# EAGLE board Clock_generator (EAGLE 9.6.2)
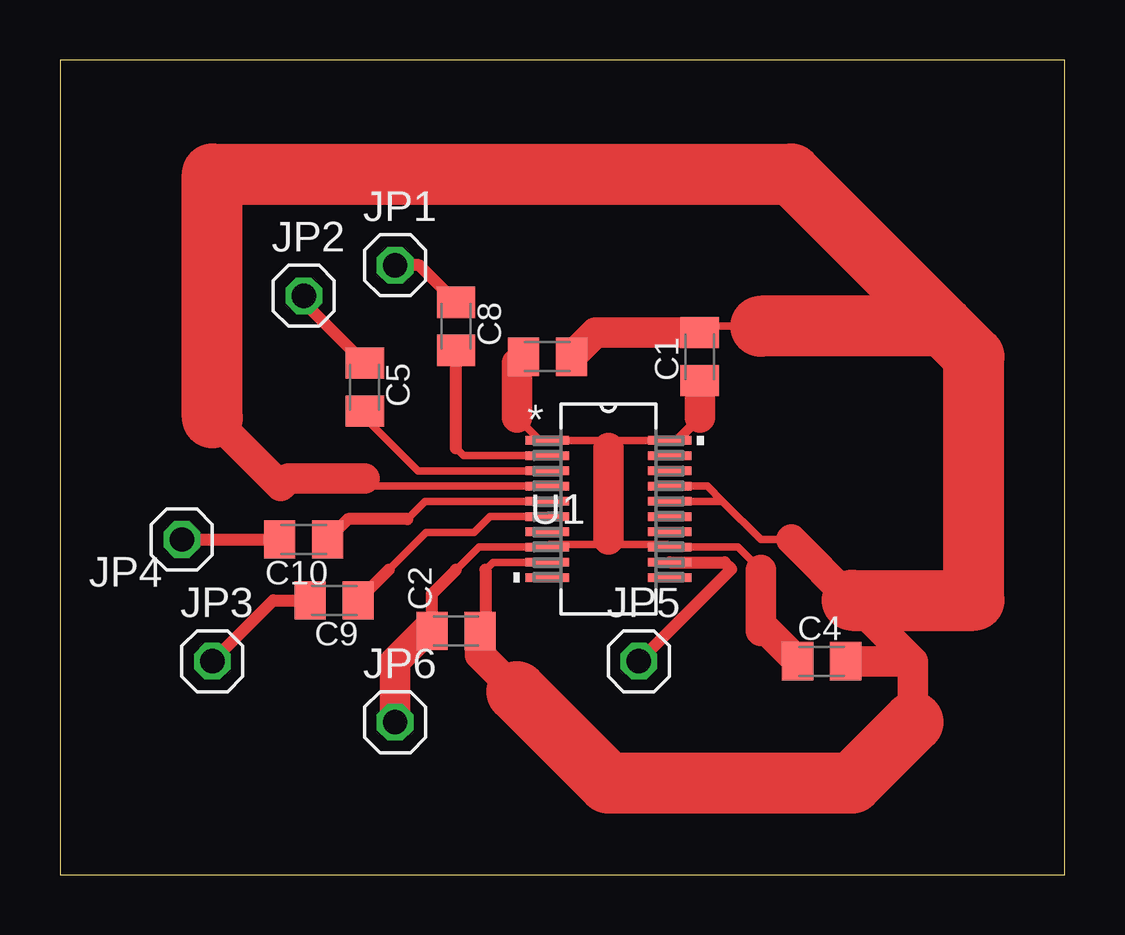
[diagram p0: board, top side]

Size 41.89 x 33.96 mm. Coordinates in mm from the lower left corner, seen from the top.
Outline: 0,0 41.89,0 41.89,33.96 0,33.96 0,0
Copper layers (1*16): Top 0.018mm / dielectric 1.55mm / Bottom 0.018mm
Design rules "Eurocircuits_GT_panel": minimum track width 0.25mm, minimum drill 0.35mm, track to track 0.2mm, track to pad 0.2mm, pad to pad 0.2mm, via to via 0.2mm, smd to smd 0mil, copper to edge 0.25mm, drill to drill 0.35mm, minimum pad ring 0.25mm, minimum via ring 0.25mm, stop-mask expansion 0mil, vias tented up to drill 0.45mm, thermal gap 0.2mm

## Footprints (pad centres in the part's own frame; a part is rotated, then mirrored left to right if it is on the bottom)
C0805K = smd 1.3 x 1.6: 1 -1,0; 2 1,0
1X01 = drill 1.016 octagon: 1 0,0
DBQ20 = smd 1.803 x 0.356: 1 -2.553,2.857; 2 -2.553,2.223; 3 -2.553,1.587; 4 -2.553,0.953; 5 -2.553,0.318; 6 -2.553,-0.318; 7 -2.553,-0.953; 8 -2.553,-1.587; 9 -2.553,-2.223; 10 -2.553,-2.857; 11 2.553,-2.857; 12 2.553,-2.223; 13 2.553,-1.587; 14 2.553,-0.953; 15 2.553,-0.318; 16 2.553,0.318; 17 2.553,0.953; 18 2.553,1.587; 19 2.553,2.223; 20 2.553,2.857

## Placement (x,y rotation side)
C1  [C0805K]  26.67,21.59 90 top
C2  [C0805K]  16.51,10.16 0 top
C3  [C0805K]  20.32,21.59 0 top
C4  [C0805K]  31.75,8.89 0 top
C5  [C0805K]  12.7,20.32 270 top
C8  [C0805K]  16.51,22.86 270 top
C9  [C0805K]  11.43,11.43 180 top
C10  [C0805K]  10.16,13.97 180 top
JP1  [1X01]  13.97,25.4 0 top
JP2  [1X01]  10.16,24.13 0 top
JP3  [1X01]  6.35,8.89 0 top
JP4  [1X01]  5.08,13.97 0 top
JP5  [1X01]  24.13,8.89 0 top
JP6  [1X01]  13.97,6.35 0 top
U1  PLL1707DBQ  [DBQ20]  22.86,15.24 0 top

## Library data of the parts
C1-C5 C8-C10 = rcl; SPICEPREFIX: C
JP1-JP6 = pinhead
U1 = PLL1707; DATASHEET_URL: http://www.ti.com/lit/gpn/PLL1707; DESCRIPTION: 3.3 V Dual PLL Multi-Clock Generator; FAMILY_NAME: AUDIO CLOCKS; GENERIC_PART_NUMBER: PLL1707; INDUSTRY_STD_PKG_TYPE: SSOP/QSOP; MANUFACTURER: Texas Instruments; MANUFACTURER_PART_NUMBER: PLL1707DBQ; PACKAGE_DESIGNATOR: DBQ; PIN_COUNT: 20; VENDOR: Texas Instruments

## Nets
+3V3: C1.1 C2.1 C3.1 C4.1 JP6.1 U1.1 U1.8 U1.13 U1.20
GND: C1.2 C2.2 C3.2 C4.2 U1.4 U1.9 U1.16 U1.17
N$1: C8.2 U1.2
N$2: C5.2 U1.3
N$5: C8.1 JP1.1
N$6: C5.1 JP2.1
N$9: C10.1 U1.5
N$10: C9.1 U1.6
N$11: JP5.1 U1.12
N$12: C9.2 JP3.1
N$13: U1.7
N$14: C10.2 JP4.1

## Tracks (layer width: path | path; a pad name or v marks a point on that pad's centre or on a via)
+3V3
  Top 0.305: 19.05,19.05 20,18.1 U1.1 22.54,18.1 22.86,17.78 23.18,18.1 U1.20 | 29.21,12.7 28.26,13.65 U1.13 25.31,13.76 23.07,13.76 22.86,13.97 22.65,13.76 20.41,13.76 U1.8 17.46,13.65 16.51,12.7
  Top 0.406: 26.67,19.05 25.72,18.1 U1.20
  Top 0.508: C2.1 15.51,11.7 16.51,12.7
  Top 1.27: C3.1 19.05,21.32 19.05,19.05 | C1.1 26.67,19.05 | C4.1 29.48,10.16 29.21,10.16 29.21,12.7 | JP6.1 13.97,8.89 15.24,10.16 C2.1 | 22.86,17.78 22.86,13.97
GND
  Top 0.305: 29.21,22.86 26.94,22.86 C1.2 | U1.17 26.99,16.19 27.62,15.56 | 27.62,15.56 29.21,13.97 30.48,13.97 | U1.16 27.62,15.56 | U1.4 13.02,16.19 12.7,16.51 | U1.9 18.05,13.02 17.73,12.7
  Top 0.508: 17.73,12.7 17.73,10.38 C2.2
  Top 1.27: C3.2 22.32,22.59 C1.2 | 30.48,13.97 33.02,11.43 35.56,8.89 | C4.2 35.56,8.89 | 6.35,19.05 9.21,16.19 9.52,16.51 12.7,16.51 | 35.56,6.35 35.56,8.89 | 19.05,7.62 17.51,9.16 C2.2
  Top 2.54: 33.02,11.43 38.1,11.43 38.1,21.59 36.83,22.86 | 36.83,22.86 29.21,22.86 | 6.35,19.05 6.35,29.21 30.48,29.21 36.83,22.86 | 35.56,6.35 33.02,3.81 22.86,3.81 19.05,7.62
N$1
  Top 0.305: U1.2 16.83,17.46 16.51,17.78
  Top 0.508: 16.51,17.78 C8.2
N$2
  Top 0.305: U1.3 14.92,16.83 12.7,19.05 C5.2
N$5
  Top 0.508: C8.1 14.97,25.4 JP1.1
N$6
  Top 0.508: C5.1 10.16,23.86 JP2.1
N$9
  Top 0.305: U1.5 15.23,15.56 14.48,14.81
  Top 0.508: 14.48,14.81 12,14.81 C10.1
N$10
  Top 0.305: 13.7,12.7 15.26,14.26 17.26,14.26 17.92,14.92 U1.6
  Top 0.508: 13.7,12.7 C9.1
N$11
  Top 0.508: U1.12 27.7,13.02 27.98,12.74 JP5.1
N$12
  Top 0.508: JP3.1 8.89,11.43 C9.2
N$14
  Top 0.508: JP4.1 C10.2